# Altium PCB NCP3066_LCD背光.PcbDoc
Units mil, origin at the board's own origin, x right, y up, seen from the top; angles counter-clockwise.
Board outline 6770 x 7920 mil, 2 copper layers (Top Layer, Bottom Layer); 17 components, 16 nets, 56 pads, 10 vias.
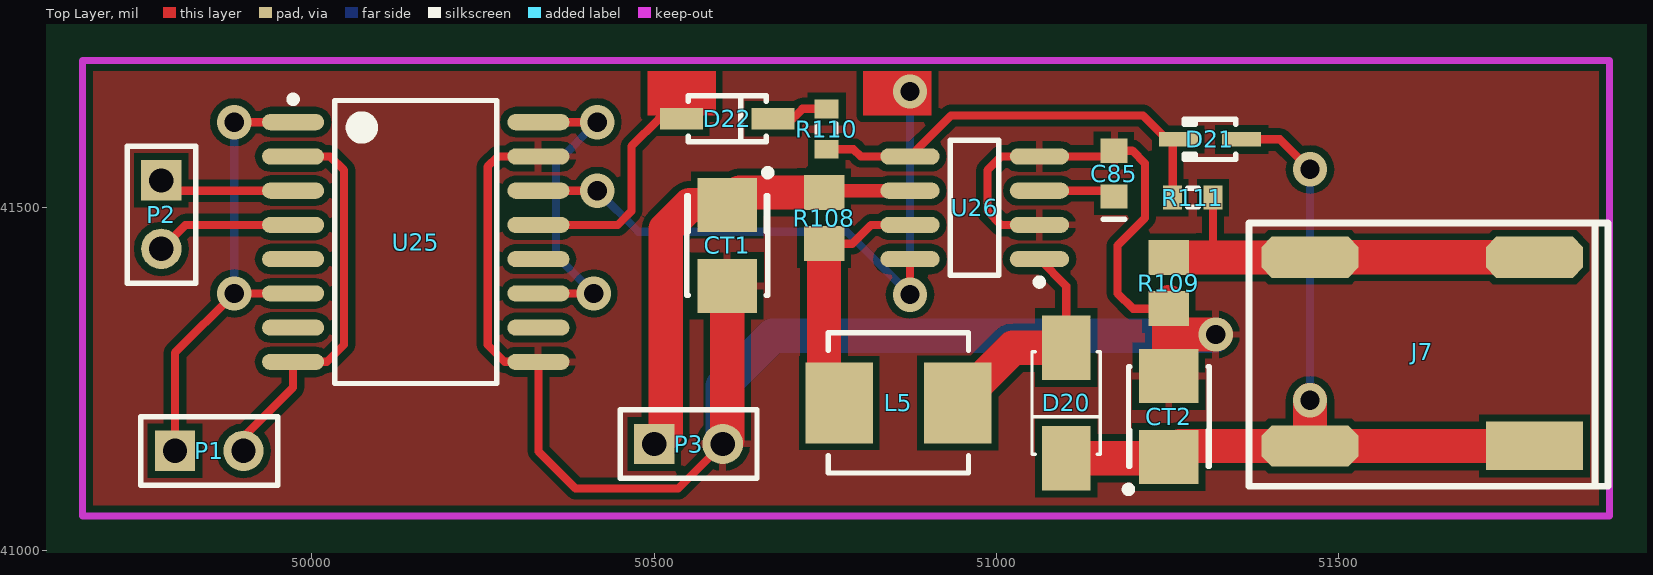
[diagram p0: Top Layer view]
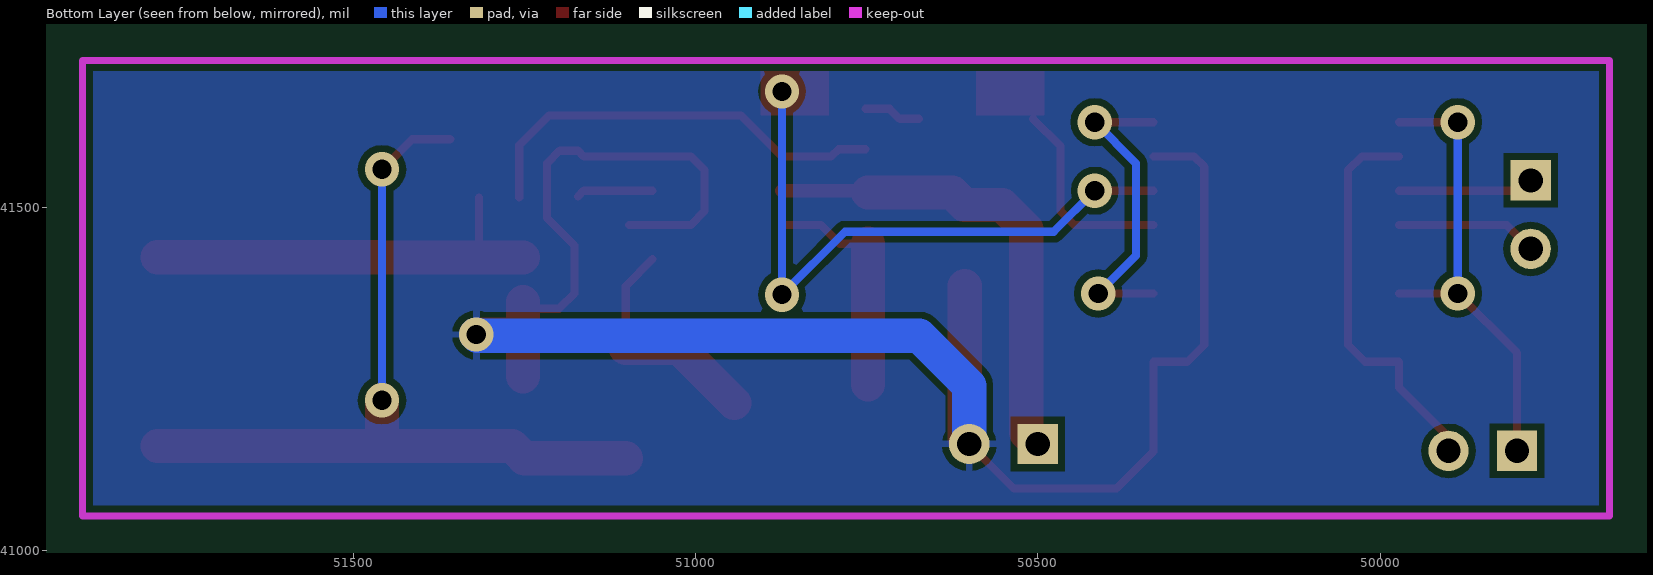
[diagram p1: Bottom Layer view, seen from below]
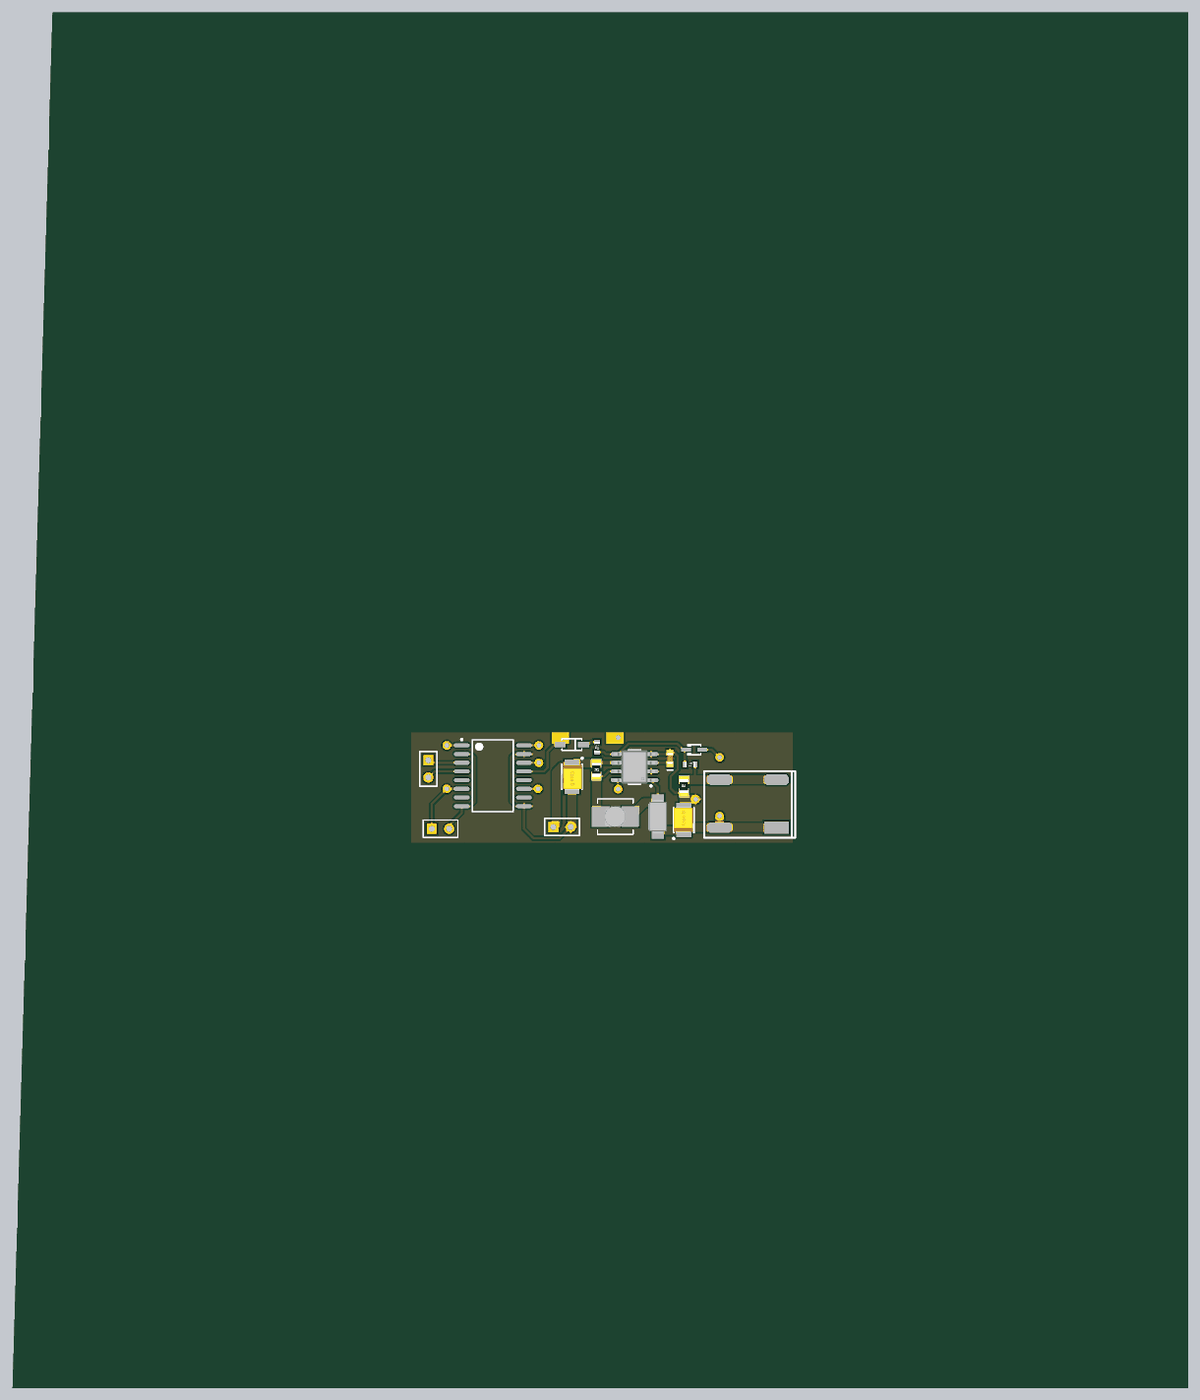
[diagram p2: 3D render of the assembled board from above, using the file's embedded part models]

## Layer stack, top to bottom
Top Layer: signal copper 1.4
Dielectric: dielectric 12.6, FR-4, Dk 4.8
Bottom Layer: signal copper 1.4

## Board outline
47615,45845 54155,45845 54155,37925 47385,37925

## Design rules (kind name [scope] priority, off if disabled: settings)
Clearance [All] p1: gap=10
PolygonConnect [All] p1: connectstyle=Relief reliefconductorwidth=10 reliefentries=4 polygonreliefangle="90 Angle"
RoomDefinition NCP3066 [InComponentClass('NCP3066')] p1: confinementstyle=ConfineIn formatcopy=TRUE lockcomponents=FALSE outline 52081.61,41855 49620,41855 49620,40780 52081.61,40780
RoutingVias [All] p1: holewidth=10 width=20 viastyle="Through Hole" minholewidth=28 minwidth=50 maxholewidth=28 maxwidth=50
SilkscreenOverComponentPads [All] p1: minsilkscreentomaskgap=10
SolderMaskExpansion [All] p1: expansion=4
Width [All] p1: maxlimit=100 minlimit=10 preferedwidth=10
27 further rules are at their usual default settings.

## Components (designator, comment, footprint, x,y, rotation, side; value= is the part's Value field where it differs from the comment)
C85 "0.1uF" 1608[0603] 51171.61,41550 r90 top
CT1 "2.2uF/50V" 3528 50606.61,41445 r270 top
CT2 "2.2uF/50V" 3528 51251.61,41195 r90 top
D20 "SS14" DO-214AC/SMA 51101.61,41215 r270 top
D21 "BZX384-B30" SOD-323 51311.61,41600 r180 top
D22 "IN4148" SOD123 50606.61,41630 r0 top
J7 "JST" JST 51621.61,41290 r270 top
L5 "CDRH5D28R/H125-330" INDP5050X28N 50856.61,41215 r0 top
P1 "Header 2" HDR1X2 49800,41145 r0 top
P2 "Header 2" HDR1X2 49780,41540 r270 top
P3 "Header 2" HDR1X2 50500,41155 r0 top
R108 "2R" 2012[0805] 50747.95,41485 r270 top
R109 "2R" 2012[0805] 51251.61,41390 r90 top
R110 "150K" 0603R 50751.61,41615 r90 top
R111 "10K" 0603R 51286.61,41515 r180 top
U25 "ADuM5200" SOIC16_N 50151.61,41450 r0 top
U26 "MC33063AD" SOIC8_N 50967.95,41500 r180 top

## Footprints (in the part's own frame and the unit in brackets; to place one, negate y for a bottom-side part, rotate by r counter-clockwise, add the part's x,y. Pads: shape width x height; smd on the part's side, far side on the other; paste and mask are expansions set on the pad)
0603R [mm]
  rect 0.7x0.9 smd: 1(-0.75,0) 2(0.75,0)
  silkscreen extent -0.2,-0.35 0.2,0.35, body extent -0.77,-0.42 0.78,0.43, height 0.45
1608[0603] [mm]
  rect 0.9x1 smd: 1(-0.85,0) 2(0.85,0)
  silkscreen extent -1.7,-0.4 -1.7,0.4, body extent -1.3,-0.5 1.3,0.5, height 0.89
2012[0805] [mm]
  rect 1.3x1.5 smd: 1(-0.95,0) 2(0.95,0)
  body extent -1.51,-0.7 1.49,0.7, height 0.53
3528 [mm]
  rect 2x2.2 smd: 1(-1.5,0) 2(1.5,0)
  silkscreen extent -2.82,-1.5 1.85,1.63, body extent -1.79,-1.31 1.9,1.51, height 2.74
DO-214AC/SMA [mm] "DO-214-AC/SMA; 2 C-Ben"
  rect 2.4x1.8 smd: 1(-2.05,0) 2(2.05,0)
  silkscreen extent -1.91,-1.27 1.91,1.27, body extent -2.6,-1.3 2.6,1.3, height 2.38
HDR1X2 [mm] "Connector; Header; 2 Position"
  rect 1.5x1.5 hole 0.9: 1(0,0)
  round 1.5 hole 0.9: 2(2.54,0)
  silkscreen extent -1.27,-1.27 3.81,1.27
INDP5050X28N [mm]
  rect 2.5x3 smd: 1(-2.2,0) 2(2.2,0)
  silkscreen extent -2.6,-2.6 2.6,2.6, body extent -1.56,-1.53 1.51,1.54, height 2
JST [mm]
  rect 1.8x3.6 smd: 1(3.5,4.161)
  oct 1.524x3.6 smd: 1(3.5,-4.161) 2(-3.5,4.161) 2(-3.5,-4.161)
  silkscreen extent -4.77,-6.43 5,6.89, body extent -4.84,-6.41 4.99,6.95, height 1.27
SOD123 [mm] "SOD-123; 2 Leads; Body 2.7 x"
  rect 1.6x0.8 smd: 1(-1.7,0) 2(1.7,0)
  silkscreen extent -1.45,-0.85 1.45,0.85
SOD-323 [mm] "SOD-323/SC-76; 2 Leads; Body 1.7 x 1.3 mm, (LxW)"
  rect 1.45x0.55 smd: 1(1.175,0) 2(-1.175,0)
  silkscreen extent -0.95,-0.75 0.95,0.75
SOIC8_N [mm] "SOIC, 8-Leads, Body 4.9x3.9mm, Pitch 1.27mm, IPC Medium Density"
  oval 2.2x0.6 smd: 1(-2.4,1.905) 2(-2.4,0.635) 3(-2.4,-0.635) 4(-2.4,-1.905) 5(2.4,-1.905) 6(2.4,-0.635) 7(2.4,0.635) 8(2.4,1.905)
  silkscreen extent -2.53,-2.5 0.9,2.88, body extent -3,-2.45 3,2.45, height 1.7
SOIC16_N [mm] "16-Pin Small Outline Integrated Circuit 1.27 mm Pitch, IPC Medium Density"
  oval 2.3x0.6 smd: 1(-4.55,4.445) 2(-4.55,3.175) 3(-4.55,1.905) 4(-4.55,0.635) 5(-4.55,-0.635) 6(-4.55,-1.905) 7(-4.55,-3.175) 8(-4.55,-4.445) 9(4.55,-4.445) 10(4.55,-3.175) 11(4.55,-1.905) 12(4.55,-0.635) 13(4.55,0.635) 14(4.55,1.905) 15(4.55,3.175) 16(4.55,4.445)
  silkscreen extent -4.67,-5.25 3,5.42, body extent -3.75,-5.15 3.75,5.15, height 2.77

## Part data
C85: library part CAP, "Capacitor"
CT1 CT2: library part CAPACITOR, "独石"
D20: library part 10BQ060, "肖特基二极管"
D21: library part BZX84-C30, "Voltage Regulator Diode 2%"
D22: library part DIODE, "二极管"
J7: library part CON2, "CON"
L5: library part Inductor, "SUMIDA 车载"
P1 P2 P3: "Header, 2-Pin"
R108 R109 R111: library part RES, "RES"
R110: library part RES, "电?"
U26: "DC-to-DC Converter Control Circuit"

## Via types
v1: diameter 50, hole 28, Top Layer to Bottom Layer, 10 vias

## Nets (pads, with @x,y where several pads share a name; then routed paths per layer and width w, separated by ;. In a path a pad name is that pad's centre, name@x,y a point inside that pad or via, vN(x,y) a via of type N, cw(c..) or ccw(c..) an arc to the next point about the centre after c; other vN are vias at no path point)
DGND: P1.2 U25.2 U25.8 | length 561.9
  Top Layer w12: P1.2@49900,41165 49972.48,41237.48 U25.8 50021.61,41275 50046.61,41300 50046.61,41555 50026.61,41575 U25.2
LCD_PWREN: P2.1 U25.3 | length 198.7
  Top Layer w12: P2.1 49795,41525 U25.3
NetC85_1: C85.1 U26.3 | length 112.7
  Top Layer w12: U26.3 51163.15,41525 C85.1
NetCT2_1: CT2.1 D20.2 D21.2 J7.1 | length 1213.3
  Top Layer w12: D21.2 51413.97,41600 v1(51457.79,41556.18)
  Top Layer w50: D20.2 51249.96,41134.29 CT2.1 51267.87,41152.2 J7.1@51457.79,41152.2 ; v1(51457.79,41218.82) J7.1@51457.79,41152.2 ; J7.1@51785.43,41152.2 J7.1@51457.79,41152.2
  Bottom Layer w12: v1(51457.79,41218.82) v1(51457.79,41556.18)
NetD20_1: D20.1 L5.2 U26.1 | length 337.3
  Top Layer w12: U26.1 51101.61,41385.83 D20.1
  Top Layer w50: L5.2 51023.94,41295.71 D20.1
NetD21_1: D21.1 R110.1 R111.2 U26.5 | length 629.3
  Top Layer w12: R110.1 50791.14,41585.47 50801.61,41575 U26.5 50933.46,41635 51213.82,41635 51257.09,41591.73 R111.2
NetD22_1: D22.1 U25.13 | length 296.2
  Top Layer w12: U25.13 50446.61,41475 50466.61,41495 50466.61,41590 50506.61,41630
  Top Layer w50: 50539.68,41664.68 50540,41665
NetD22_2: D22.2 R110.2 | length 84.1
  Top Layer w12: D22.2 50701.61,41630 50716.14,41644.53 R110.2
NetJ7_2: J7.2 R109.2 R111.1 | length 614.1
  Top Layer w12: R111.1 51316.14,41432.87 51321.61,41427.4
  Top Layer w50: R109.2 51321.61,41427.4 J7.2@51448.19,41427.4 ; J7.2@51457.79,41427.8 J7.2@51785.43,41427.8
NetL5_1: L5.1 R108.2 U26.7 | length 342.4
  Top Layer w12: R108.2 50789.21,41447.6 50816.61,41475 U26.7
  Top Layer w50: L5.1@50747.95,41242.05 R108.2
NetU25_14: U25.14 U26.8 | length 962.8
  Top Layer w12: U25.14 v1(50416.61,41525) ; v1(50873.46,41373.15) U26.8
  Bottom Layer w12: v1(50416.61,41525) 50476.61,41465 50781.61,41465 v1(50873.46,41373.15) v1(50873.46,41670) v1@50873.46,41678.46
SGND: C85.2 CT1.2 CT2.2 P3.2 R109.1 U25.9 U25.15 U26.2 U26.4 | length 2823.6
  Top Layer w12: U25.15 50271.61,41575 50256.61,41560 50256.61,41300 50281.61,41275 U25.9 50330.75,41144.25 50385,41090 50535,41090 P3.2 ; U26.2@51096.61,41475 U26.2 51006.61,41475 50986.61,41495 50986.61,41555 51006.61,41575 U26.4 51163.15,41575 C85.2 51198.15,41583.46 51216.61,41565 51216.61,41485 51176.61,41445 51176.61,41375 51199.02,41352.6 R109.1@51231.61,41352.6
  Top Layer w50: P3.2 50606.61,41161.61 CT1.2 ; CT2.2 51251.61,41305 ; R109.1@51251.61,41362.6 51251.61,41305 ; v1(51320,41315) 51261.61,41315 51251.61,41305
  Bottom Layer w50: P3.2 50600,41240 50673.15,41313.15 51318.15,41313.15 v1(51320,41315)
TOUT1/GPB1: P2.2 U25.4 | length 207
  Top Layer w12: P2.2 49815,41475 U25.4
VACC5: U25.11 U25.16 | length 464.4
  Top Layer w12: U25.11 v1(50411.61,41375) ; U25.16 v1(50416.61,41625)
  Bottom Layer w12: v1(50411.61,41375) 50356.61,41430 50356.61,41565 v1(50416.61,41625)
VCC: CT1.1 P3.1 R108.1 U26.6 | length 697.3
  Top Layer w20: R108.1@50750.55,41525 U26.6
  Top Layer w50: P3.1 50516.61,41171.61 50516.61,41469 50551.67,41504.05 CT1.1 50624.96,41522.4 R108.1
VDD3V3: P1.1 U25.1 U25.6 | length 667.6
  Top Layer w12: P1.1@49800,41165 49800,41288.39 v1(49886.61,41375) U25.6 ; v1(49886.61,41625) U25.1
  Bottom Layer w12: v1(49886.61,41375) v1(49886.61,41625)
pads on no net: U25.5 U25.7 U25.10 U25.12

## Polygon pours and split planes (outlines as drawn)
SGND on Top Layer "Top Layer-No Net" (solid, pour order 2): 49665,41715 49665,41050 51895,41050 51895,41715
SGND on Bottom Layer "Top Layer-No Net" (solid, pour order 4): 49665,41715 49665,41050 51895,41050 51895,41715

## Keep-outs
Keep-Out Layer:
  lines w10: 49665,41050 51895,41050 51895,41715 49665,41715 49665,41050

## Other copper
Top Layer:
  rectangle net NetU25_14: 50805,41635 50905,41700
  rectangle net NetD22_1: 50490,41635 50590,41700

## Silkscreen, mask and mechanical layers (free items; w line width, h text height)
Top Solder:
  rectangle: 50805,41635 50905,41700
  rectangle: 50490,41635 50590,41700